# Altium PCB PCB-new.PcbDoc
Units mm, origin at the board's own origin, x right, y up, seen from the top; angles counter-clockwise.
Board outline 57.66 x 30.99 mm, 2 copper layers (Top Layer, Bottom Layer); 14 components, 9 nets, 42 pads, 0 vias.
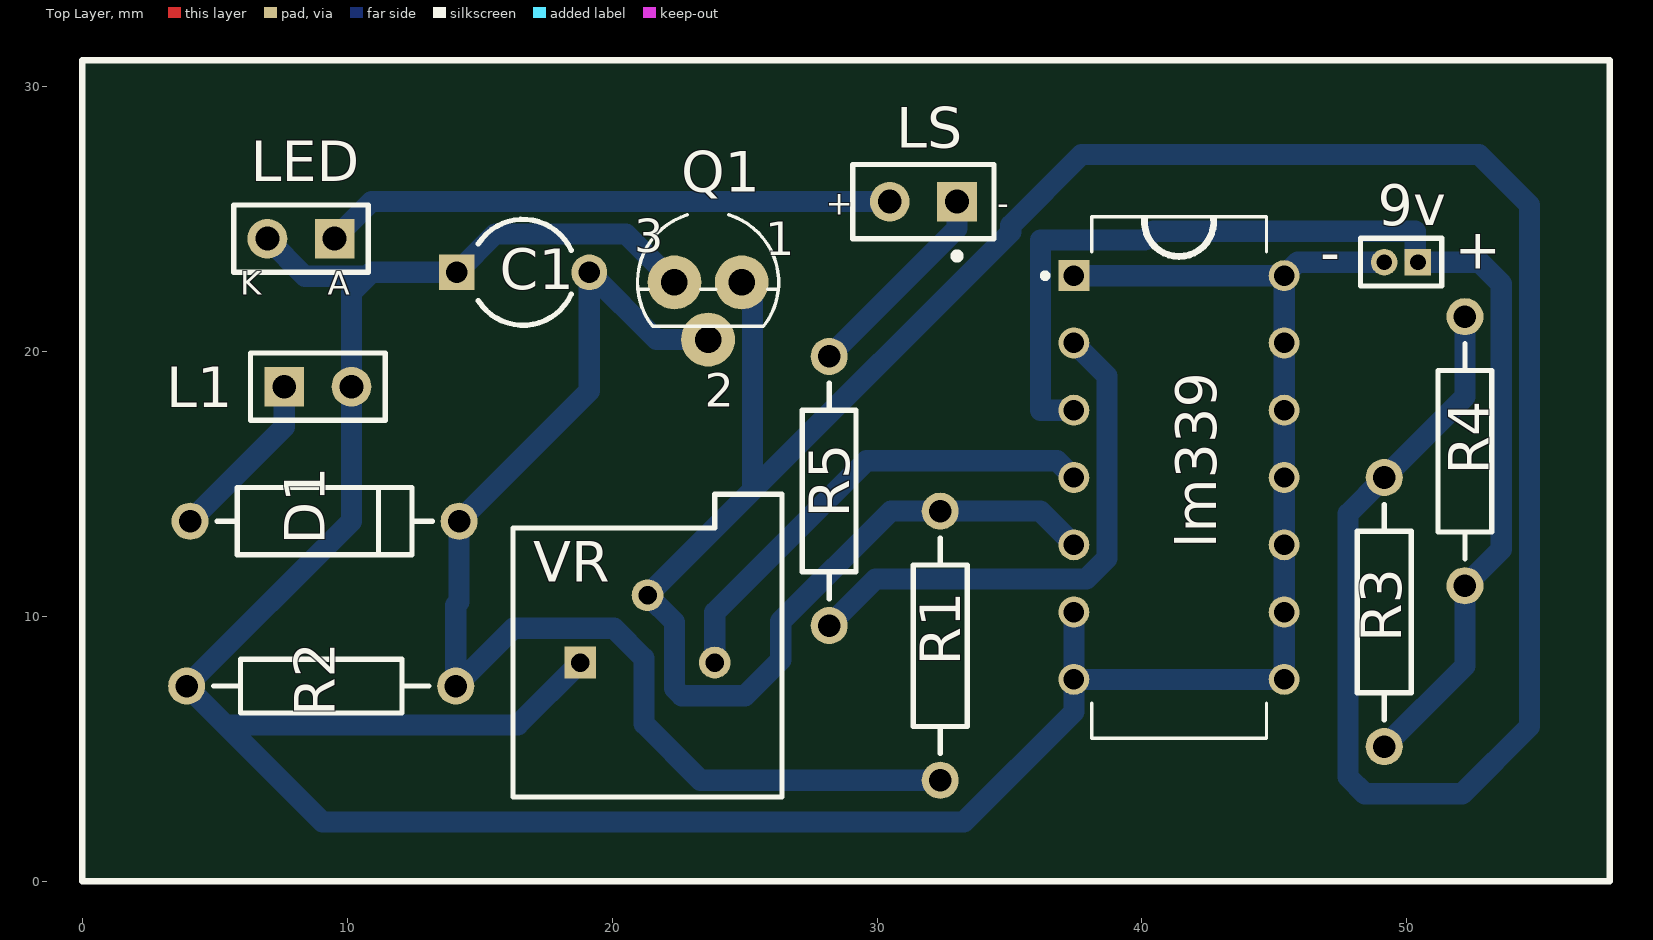
[diagram p0: Top Layer view]
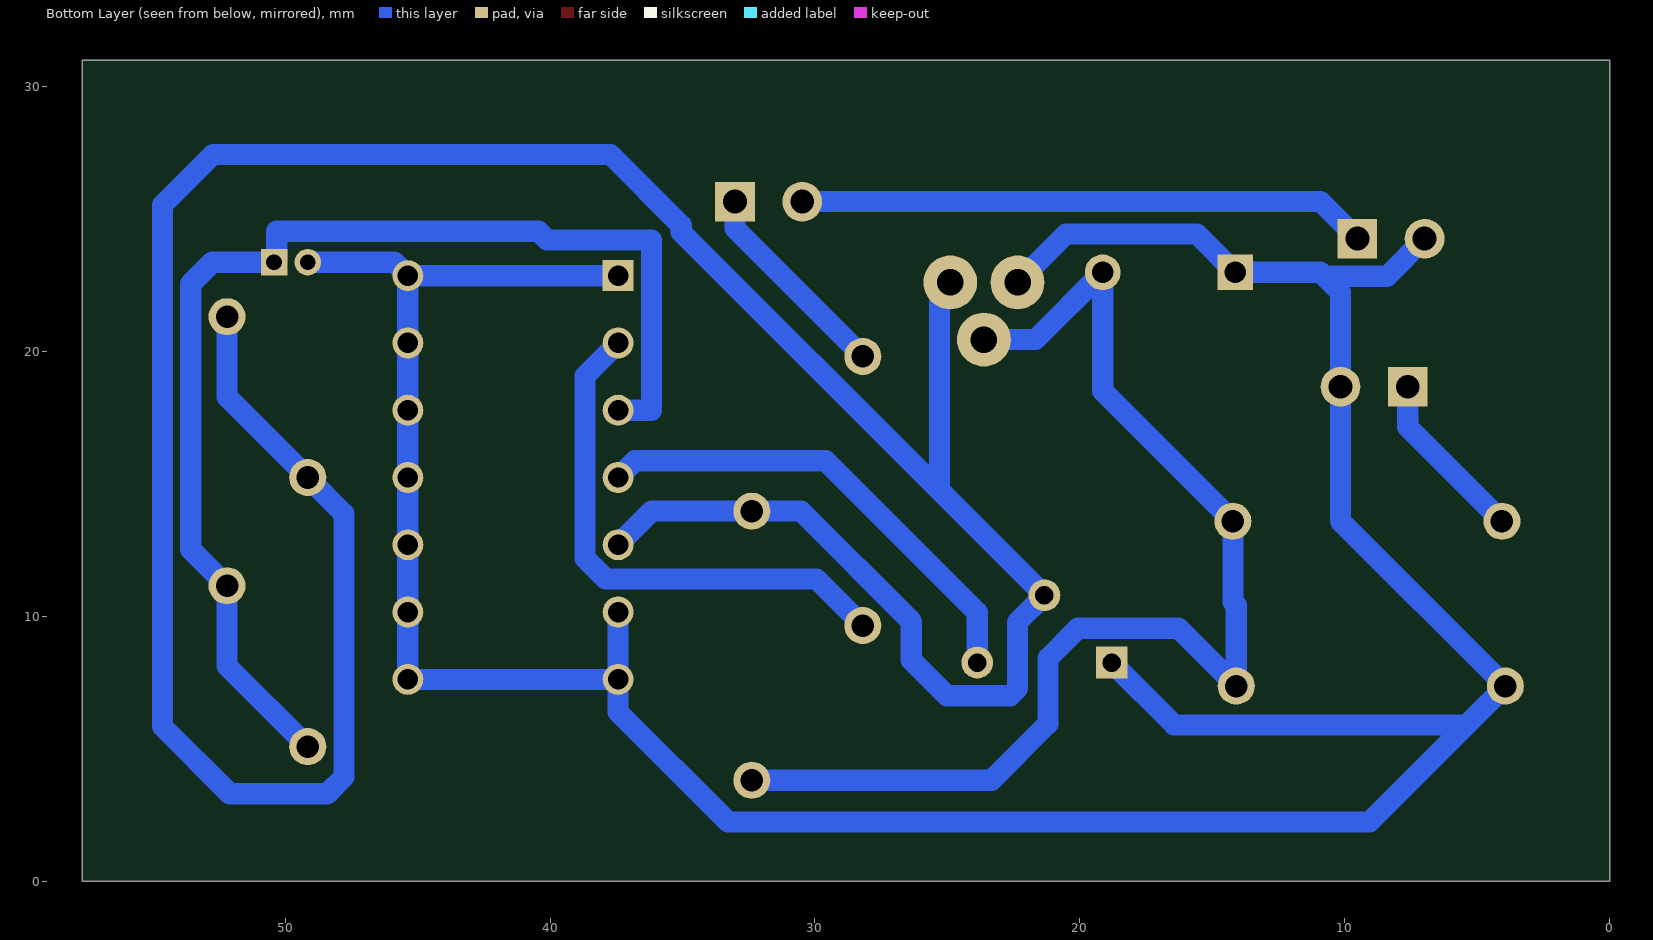
[diagram p1: Bottom Layer view, seen from below]

## Layer stack, top to bottom
Top Solder: solder mask 0.0102, Solder Resist, Dk 3.5
Top Layer: signal copper 0.0356
Dielectric 1: dielectric 0.32, FR-4, Dk 4.8
Bottom Layer: signal copper 0.0356
Bottom Solder: solder mask 0.0102, Solder Resist, Dk 3.5

## Board outline
0,0 0,30.988 57.658,30.988 57.658,0

## Design rules (kind name [scope] priority, off if disabled: settings)
Clearance [All] p1: gap=0.254 ignorepadtopadclearanceinfootprint=FALSE except(0: Arc-Hole Track-Hole SMDPad-Hole THPad-Hole Via-Hole Fill-Hole Poly-Hole Region-Hole Text-Hole)
PolygonConnect [All] p1: connectstyle=Relief reliefconductorwidth=0.254 reliefentries=4 polygonreliefangle="90 Angle" airgapwidth=0.254
RoutingLayers [All] p1: top layer_v5=FALSE bottom layer_v5=TRUE
RoutingVias [All] p1: holewidth=0.711 width=1.27 viastyle="Through Hole" minholewidth=0.711 minwidth=1.27 maxholewidth=0.711 maxwidth=1.27
SolderMaskExpansion [All] p1: expansion=0.102 istentingtop=FALSE
Width [All] p1: maxlimit=0.8 minlimit=0.8 preferedwidth=0.8
29 further rules are at their usual default settings.

## Components (designator, comment, footprint, x,y, rotation, side; value= is the part's Value field where it differs from the comment)
9v "Constant Voltage Source" MHDR1X2 50.419,23.368 r180 top
C1 "Capacitor" CAPR5-4X5 16.637,22.987 r0 top value=0.1u
D1 "Diode" DIODE-0.4 9.144,13.589 r0 top
L1 "Inductor" HDR1X2 7.62,18.669 r0 top
LED "LED" HDR1X2 9.525,24.257 r180 top
lm339 "LM339N" DIP794W45P254L1969H508Q14 41.402,15.24 r0 top
LS "Speaker" PIN2 33.02,25.654 r180 top
Q1 "BC547" TO92 23.622,22.606 r0 top
R1 "Resistor" AXIAL-0.4 32.385,8.89 r90 top value=10K
R2 "Resistor" AXIAL-0.4 9.017,7.366 r180 top value=100
R3 "Resistor" AXIAL-0.4 49.149,10.16 r90 top value=3k
R4 "Resistor" AXIAL-0.4 52.197,16.232 r90 top value=200
R5 "Resistor" AXIAL-0.4 28.194,14.732 r90 top value=10
VR "RPot" VR4 21.336,9.525 r0 top value=100

## Footprints (in the part's own frame and the unit in brackets; to place one, negate y for a bottom-side part, rotate by r counter-clockwise, add the part's x,y. Pads: shape width x height; smd on the part's side, far side on the other; paste and mask are expansions set on the pad)
AXIAL-0.4 [mm] "Axial Device, Thru-Hole; 2 Leads; 0.4 in Pin Spacing"
  round 1.4 hole 0.85: 1(-5.08,0) 2(5.08,0)
  silkscreen extent -4.06,-1.02 4.06,1.02
CAPR5-4X5 [mm] "Capacitor; 2 Leads"
  rect 1.35x1.35 hole 0.8: 1(-2.5,0)
  round 1.35 hole 0.8: 2(2.5,0)
  silkscreen extent -1.69,-2 1.82,2
DIODE-0.4 [mm] "Diode, Thru-Hole; 2 Leads; 0.4 in Pin Spacing"
  round 1.4 hole 0.85: 1(-5.08,0) 2(5.08,0)
  silkscreen extent -4.06,-1.27 4.06,1.27
DIP794W45P254L1969H508Q14 [mm]
  rect 1.17x1.17 hole 0.77: 1(-3.97,7.62)
  round 1.17 hole 0.77: 2(-3.97,5.08) 3(-3.97,2.54) 4(-3.97,0) 5(-3.97,-2.54) 6(-3.97,-5.08) 7(-3.97,-7.62) 8(3.97,-7.62) 9(3.97,-5.08) 10(3.97,-2.54) 11(3.97,0) 12(3.97,2.54) 13(3.97,5.08) 14(3.97,7.62)
  silkscreen extent -5.15,-9.84 3.3,9.84
HDR1X2 [mm] "Connector; Header; 2 Position"
  rect 1.5x1.5 hole 0.9: 1(0,0)
  round 1.5 hole 0.9: 2(2.54,0)
  silkscreen extent -1.27,-1.27 3.81,1.27
MHDR1X2 [mm] "Connector; Header; 2 Position"
  rect 1x1 hole 0.6: 1(0,0)
  round 1 hole 0.6: 2(1.27,0)
  silkscreen extent -0.9,-0.9 2.17,0.9
PIN2 [mm] "Photosensitive Diode; 2 Leads"
  rect 1.5x1.5 hole 0.9: 1(0,0)
  round 1.5 hole 0.9: 2(2.54,0)
  silkscreen extent -1.4,-1.4 3.94,2.17
TO92 [mil]
  round 80 hole 39.37: 1(50,0) 2(0,-85) 3(-50,0)
  silkscreen extent -105,-65 105,100
VR4 [mm] "Thru-Hole; 3 Leads"
  rect 1.2x1.2 hole 0.7: 1(-2.54,-1.27)
  round 1.2 hole 0.7: 2(0,1.27) 3(2.54,-1.27)
  silkscreen extent -5.08,-6.35 5.08,5.08

## Part data
9v: library part Battery, DC Magnitude=9, SimulationGenericComponent=True
LED: "Light-Emitting Diode", AF=1, BV=0, BV_MAX=1e99, CJO=0, CJP=0, CTA=0, CTP=0, EG=1.11, FC=0.5, FCS=0.5, FV_MAX=1e99, IBV=0.001, IKF=0, IKR=0, IS=1e-14, ISR=1e-14, JSW=0, JTUN=0, JTUNSW=0, KEG=1, KF=0, LEVEL=1, MJSW=0.33, N=1, NBV=1, NR=1, NS=1, NTUN=30, PHP=1, RS=0, SimulationGenericComponent=True, TCV=0, TLEV=0, TLEVC=0, TM1=0, TM2=0, TNOM=27, TPB=0, TPHP=0, TRS=0, TRS2=0, TT=0, TTT1=0, TTT2=0, VJ=1, XTI=3, XTITUN=3
lm339: Package=None, Availability=Unavailable, MP=LM339N, Price=None
LS: "Loudspeaker", LatestRevisionDate=17-Jul-2002, LatestRevisionNote="Re-released for DXP Platform.", PackageReference=PIN2, Published=24-Mar-1999, Publisher="Altium Limited"
Q1: library part "BJT NPN_MGP", "Bipolar NPN 3 Pins Transistor Modified Version of the Gummel-Poon Model", AF=0, BF=100, BR=1, CJC=0, CJE=0, CJS=0, CTC=0, CTE=0, CTS=0, EG=1.11, FC=0.5, IKF=0, IKR=0, IRB=0, IS=1e-16, ISC=0, ISE=0, ISS=0, ITF=0, KF=0, MJC=0.33, MJE=0.33, MJS=0, NC=2, NE=1.5, NF=1, NKF=0.5, NR=1, NS=1, PTF=0, RB=0, RBM=0, RC=0, RE=0, SimulationGenericComponent=True, SUBS=1, TBF1=0, TBF2=0, TBR1=0, TBR2=0, TF=0, TIKF1=0, TIKF2=0, TIKR1=0, TIKR2=0, TIRB1=0, TIRB2=0, TIS1=0, TIS2=0, TISC1=0, TISC2=0, TISE1=0, TISE2=0, TITF1=0, TITF2=0, TLEV=0, TLEVC=0, TMJC1=0, TMJC2=0, TMJE1=0, TMJE2=0, TMJS1=0, TMJS2=0, TNC1=0, TNC2=0, TNE1=0, TNE2=0, TNF1=0, TNF2=0, TNOM=27, TNR1=0, TNR2=0, TNS1=0, TNS2=0, TR=0, TRB1=0, TRB2=0, TRC1=0, TRC2=0, TRE1=0, TRE2=0, TRM1=0, TRM2=0, TTF1=0, TTF2=0, TTR1=0, TTR2=0, TVAF1=0, TVAF2=0, TVAR1=0, TVAR2=0, TVJC=0, TVJE=0, TVJS=0, VAF=0, VAR=0, VBC_MAX=1e99, VBE_MAX=1e99, VCE_MAX=1e99, VJC=0.75, VJE=0.75, VJS=0.75, VTF=0, XCJC=1, XTB=0, XTF=0, XTI=3
VR: "Potentiometer", LatestRevisionDate=17-Jul-2002, LatestRevisionNote="Re-released for DXP Platform.", PackageDescription="Variable Resistor, Thru-Hole; 3 Leads", PackageReference=VR5, Published=8-Jun-2000, Publisher="Altium Limited", Set Position=0.5, Sim Note="Enter the Resistance value and the set point into parameter fields."
C1: SimulationGenericComponent=True
D1: AF=1, BV=0, BV_MAX=1e99, CJO=0, CJP=0, CTA=0, CTP=0, EG=1.11, FC=0.5, FCS=0.5, FV_MAX=1e99, IBV=0.001, IKF=0, IKR=0, IS=1e-14, ISR=1e-14, JSW=0, JTUN=0, JTUNSW=0, KEG=1, KF=0, LEVEL=1, MJSW=0.33, N=1, NBV=1, NR=1, NS=1, NTUN=30, PHP=1, RS=0, SimulationGenericComponent=True, TCV=0, TLEV=0, TLEVC=0, TM1=0, TM2=0, TNOM=27, TPB=0, TPHP=0, TRS=0, TRS2=0, TT=0, TTT1=0, TTT2=0, VJ=1, XTI=3, XTITUN=3
L1: L1=100nH, SimulationGenericComponent=True
R1 R2 R3 R4 R5: SimulationGenericComponent=True, TC1=0, TC2=0

## Nets (pads, with @x,y where several pads share a name; then routed paths per layer and width w, separated by ;. In a path a pad name is that pad's centre, name@x,y a point inside that pad or via, vN(x,y) a via of type N, cw(c..) or ccw(c..) an arc to the next point about the centre after c; other vN are vias at no path point)
+vcc: 9v.1 lm339.3 R3.1 R4.1 | length 46
  Bottom Layer w0.8: lm339.3 36.17,17.78 36.17,24.206 40.109,24.206 40.439,24.536 50.317,24.536 50.317,23.47 9v.1 52.756,23.368 53.569,22.555 53.569,12.524 R4.1 52.197,8.128 R3.1
GND: 9v.2 C1.1 L1.2 LED.2 lm339.1 lm339.6 lm339.7 lm339.8 lm339.9 lm339.10 lm339.11 lm339.12 lm339.13 lm339.14 Q1.3 R2.2 VR.1 | length 126.3
  Bottom Layer w0.8: LED.2 8.407,22.835 10.77,22.835 ; VR.1 16.434,5.893 5.41,5.893 ; Q1.3 20.523,24.435 15.585,24.435 C1.1 10.922,22.987 10.77,22.835 ; lm339.6 lm339.7 ; lm339.1 lm339.14 ; 9v.2 45.88,23.368 lm339.14 ; 5.41,5.893 9.068,2.235 33.274,2.235 37.432,6.393 lm339.7 ; 5.41,5.893 R2.2 10.16,13.589 L1.2 10.16,22.225 10.77,22.835 ; lm339.7 lm339.8 lm339.9 lm339.10 lm339.11 lm339.12 lm339.13 lm339.14
NetC1_2: C1.2 D1.2 Q1.2 R1.1 R2.1 | length 46.3
  Bottom Layer w0.8: Q1.2 21.677,20.447 C1.2 19.137,18.502 D1.2 14.224,10.541 14.097,10.414 R2.1 16.281,9.55 20.066,9.55 21.203,8.413 21.203,5.947 23.34,3.81 R1.1
NetD1_1: D1.1 L1.1 | length 6.6
  Bottom Layer w0.8: D1.1 7.62,17.145 L1.1
NetLED_1: LED.1 LS.2 | length 21.5
  Bottom Layer w0.8: LED.1 10.922,25.654 LS.2
Netlm339_2: lm339.2 R5.1 | length 20.2
  Bottom Layer w0.8: R5.1 29.947,11.405 37.897,11.405 38.684,12.192 38.684,19.068 lm339.2
Netlm339_4: lm339.4 VR.3 | length 18.1
  Bottom Layer w0.8: VR.3 23.876,10.15 29.601,15.875 36.797,15.875 lm339.4
Netlm339_5: lm339.5 Q1.1 R1.2 R3.2 R4.2 VR.2 | length 119.8
  Bottom Layer w0.8: Q1.1 24.892,22.149 25.298,22.149 25.298,14.757 ; lm339.5 36.162,13.97 R1.2 30.523,13.97 26.365,9.812 26.365,8.347 25.019,7.001 22.631,7.001 22.352,7.28 22.352,9.779 VR.2 25.298,14.757 ; R4.2 52.197,18.288 R3.2 47.777,13.868 47.777,3.937 48.412,3.302 52.095,3.302 54.635,5.842 54.635,25.527 52.73,27.432 37.719,27.432 35.052,24.765 35.052,24.511 25.298,14.757
NetLS_1: LS.1 R5.2 | length 7.8
  Bottom Layer w0.8: R5.2 33.02,24.638 LS.1

## Polygon pours and split planes (outlines as drawn)
no net on Bottom Layer "NONET_L02_P000" (none, remove dead copper, pour order 0): 0,0 0,30.988 57.658,30.988 57.658,0 57.531,0

## Silkscreen, mask and mechanical layers (free items; w line width, h text height)
Top Overlay:
  lines w0.254: 40.101,25.022 ccw(c41.402,24.892) 42.703,25.022 ; 0,0 57.658,0 57.658,30.988 0,30.988 0,0
  text "+" at 28.067,24.861 h1.52
  text "-" at 34.544,24.853 h1.52
  text "+" at 51.816,23.114 h1.52
  text "-" at 46.736,22.987 h1.52
  text "K" at 5.969,21.844 h1.52
  text "A" at 9.271,21.844 h1.52

## Text inside footprints (layer, text, board x,y; h text height)
Q1: Top Overlay "2" at 23.495,17.907 h1.27; Top Overlay "1" at 25.781,23.622 h1.27; Top Overlay "3" at 20.828,23.749 h1.27